# Altium PCB UWB_DWM1000_ParaChina2.PcbDoc
Units mm, origin at the board's own origin, x right, y up, seen from the top; angles counter-clockwise.
Board outline 50 x 60 mm, 4 copper layers (Component Side, Signal Layer 2, Signal Layer 1, Solder Side), stack 0.844 mm thick; 66 components, 69 nets, 281 pads, 125 vias.
Unrouted connection lines stored in the file: 85.
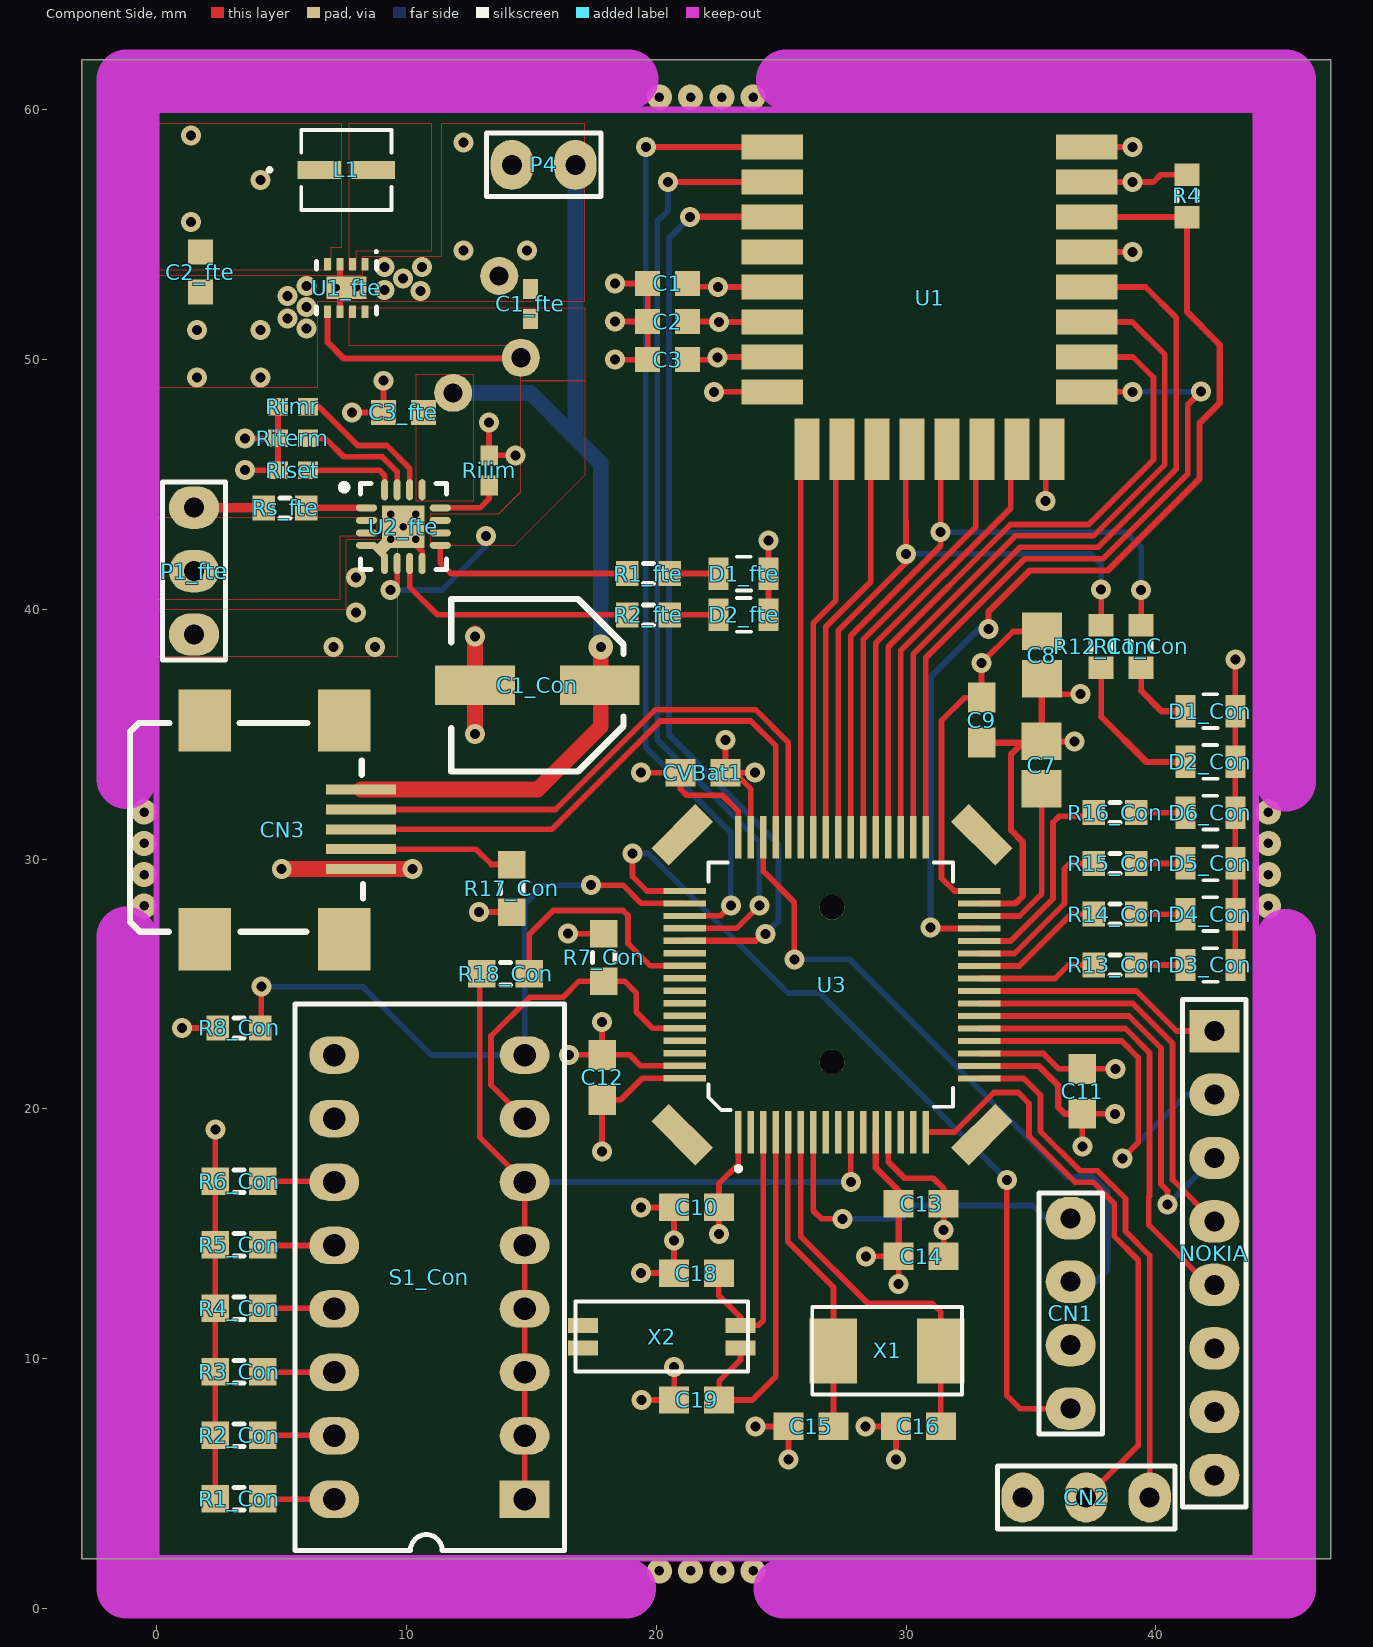
[diagram p0: Component Side view]
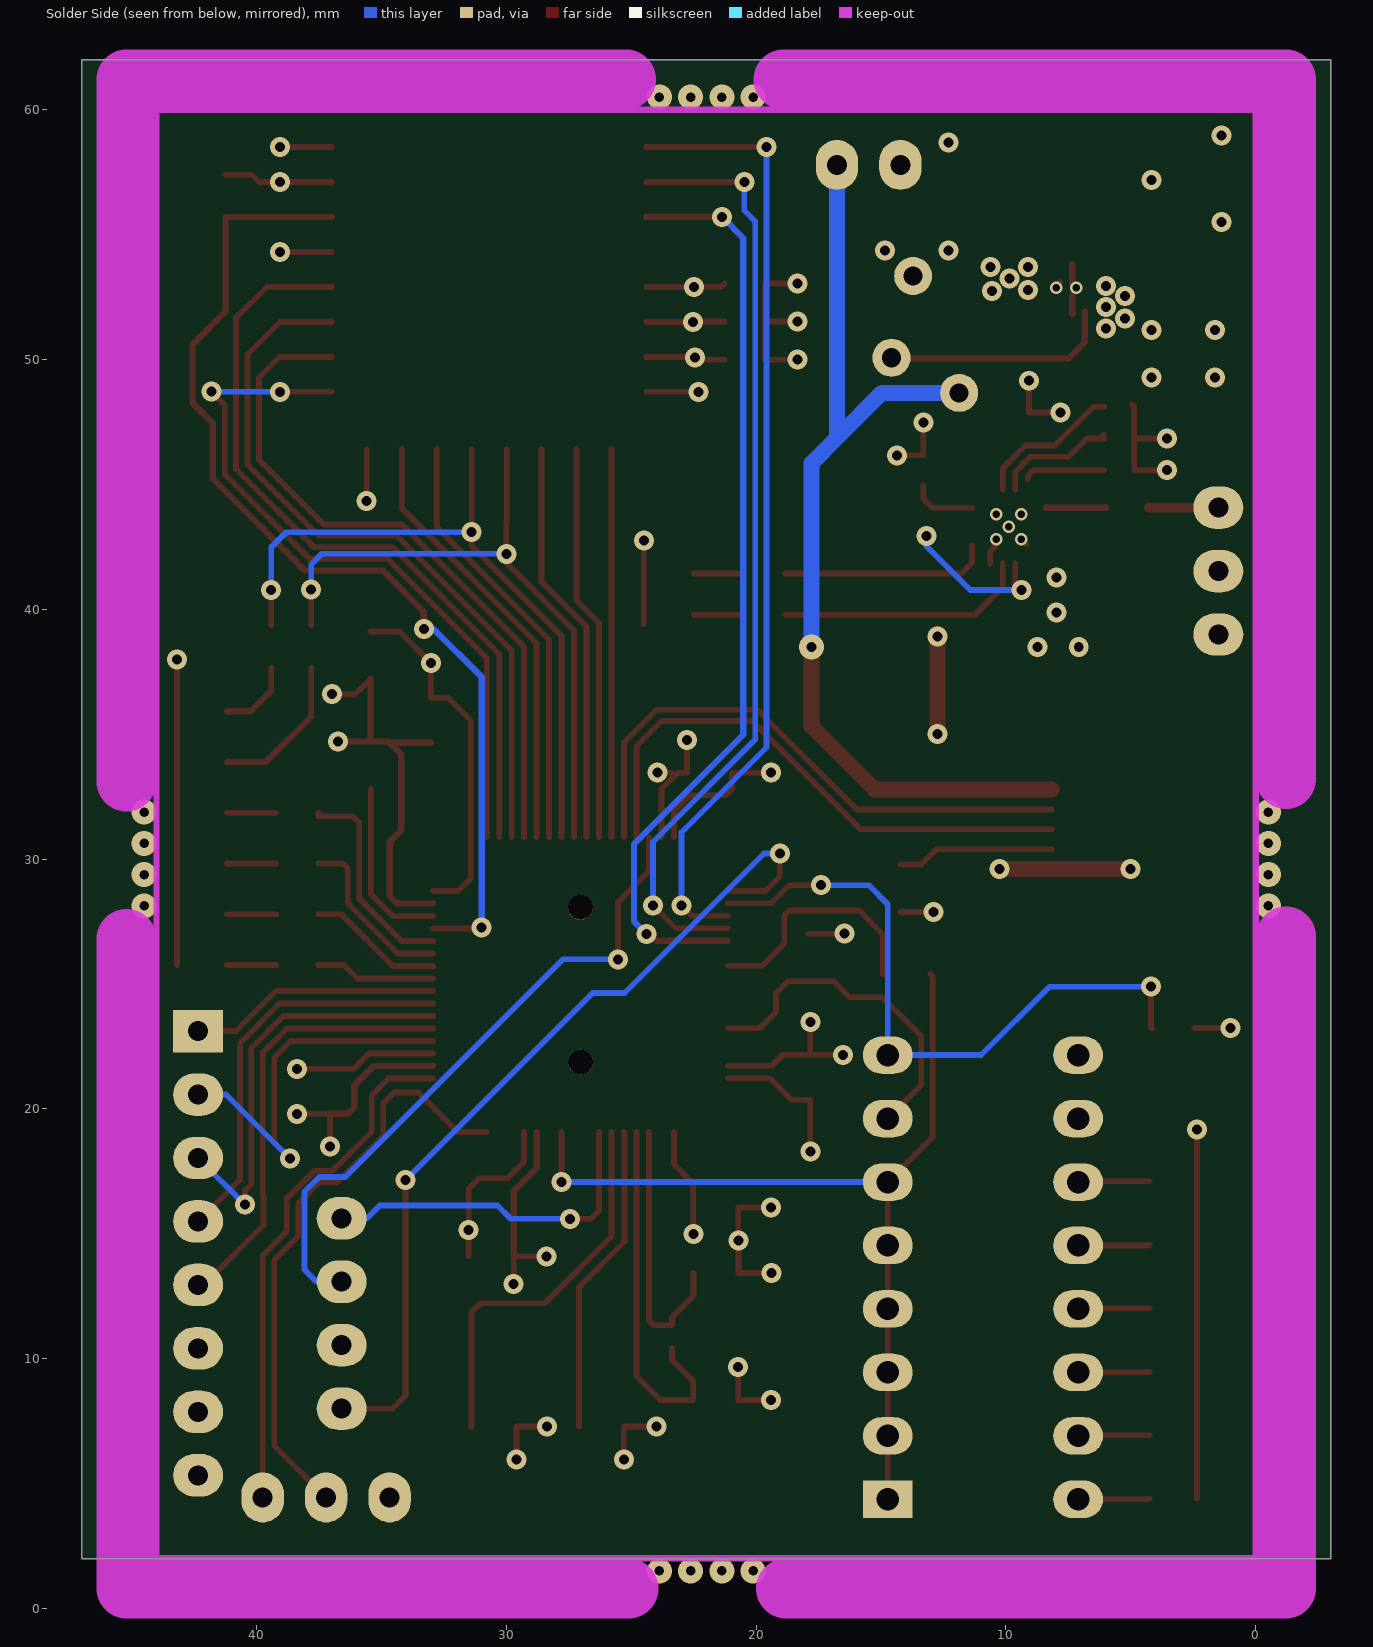
[diagram p1: Solder Side view, seen from below]
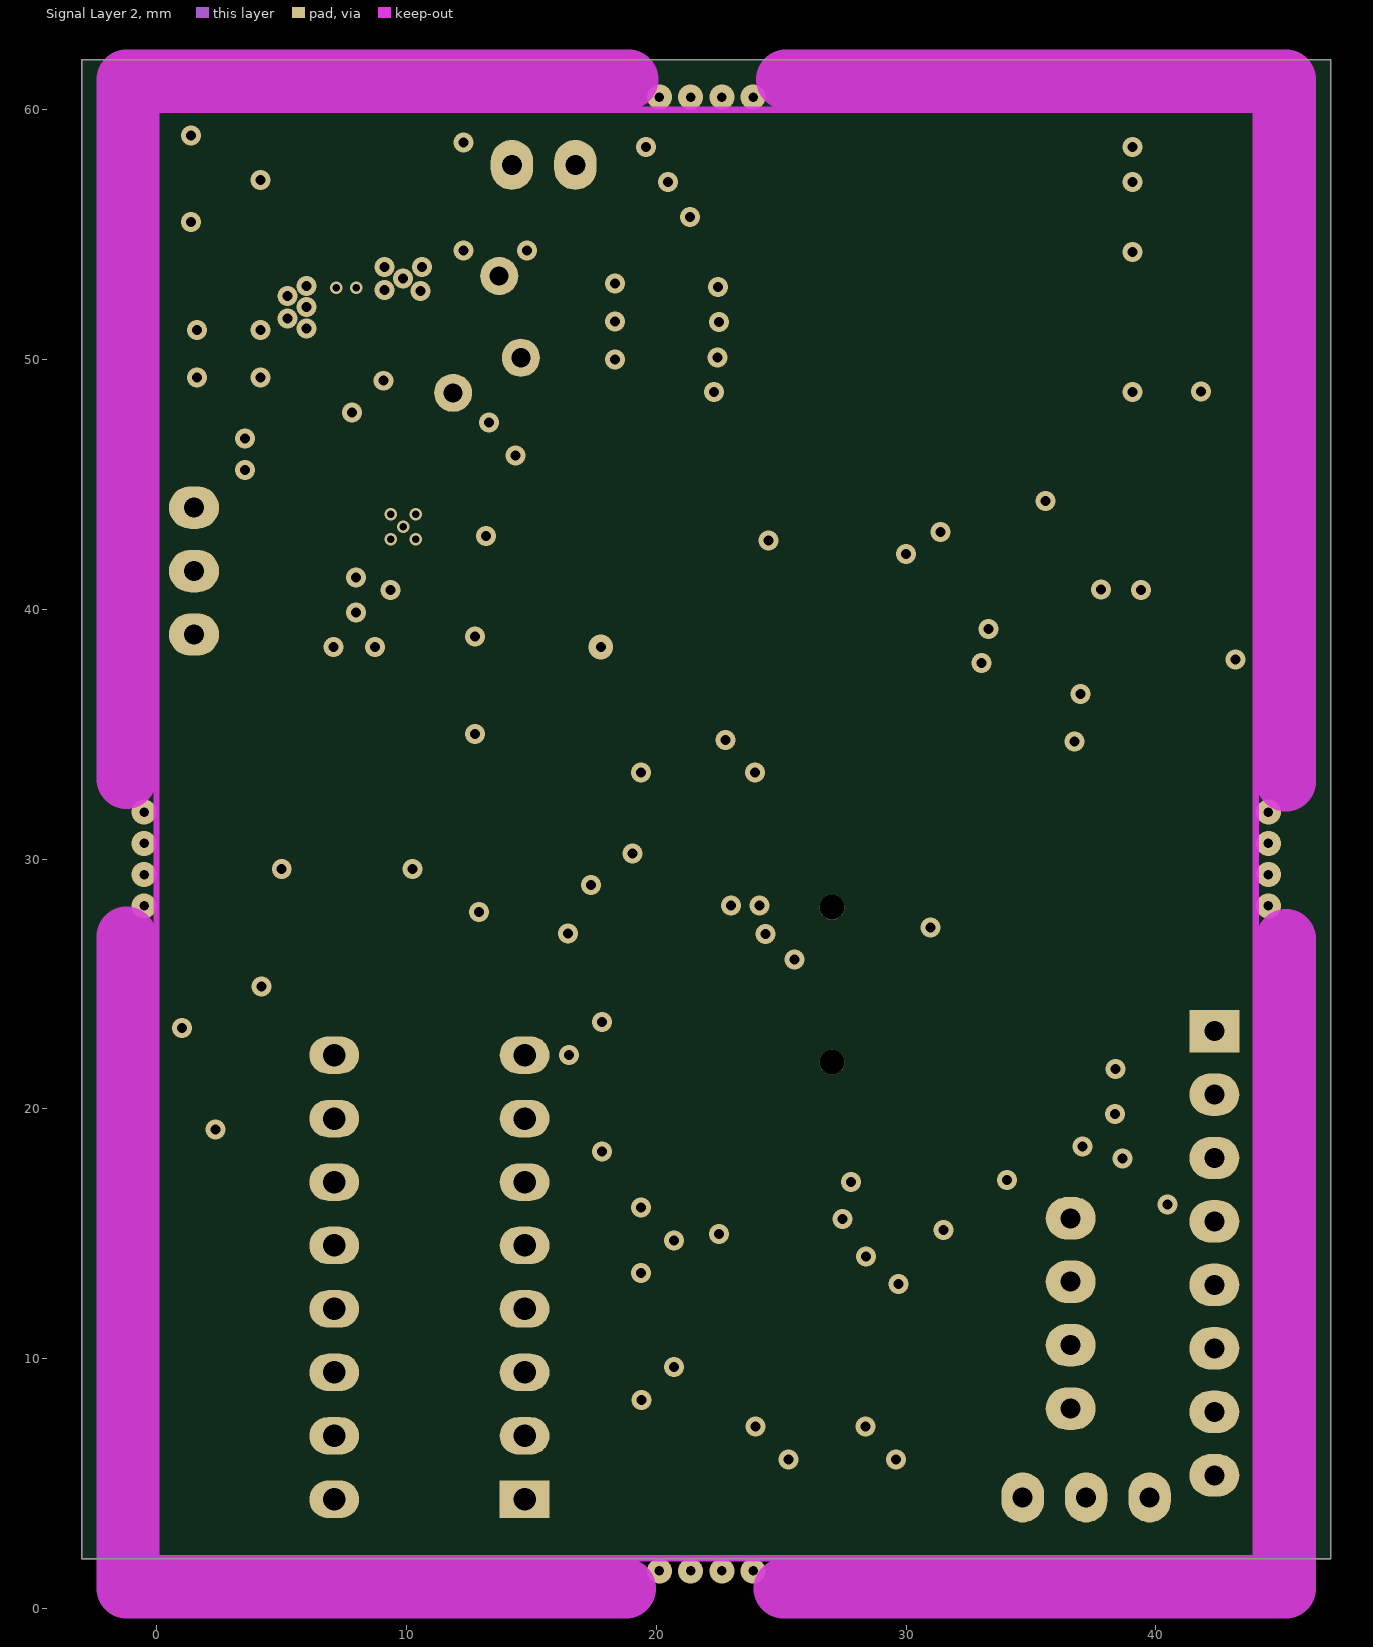
[diagram p2: Signal Layer 2]
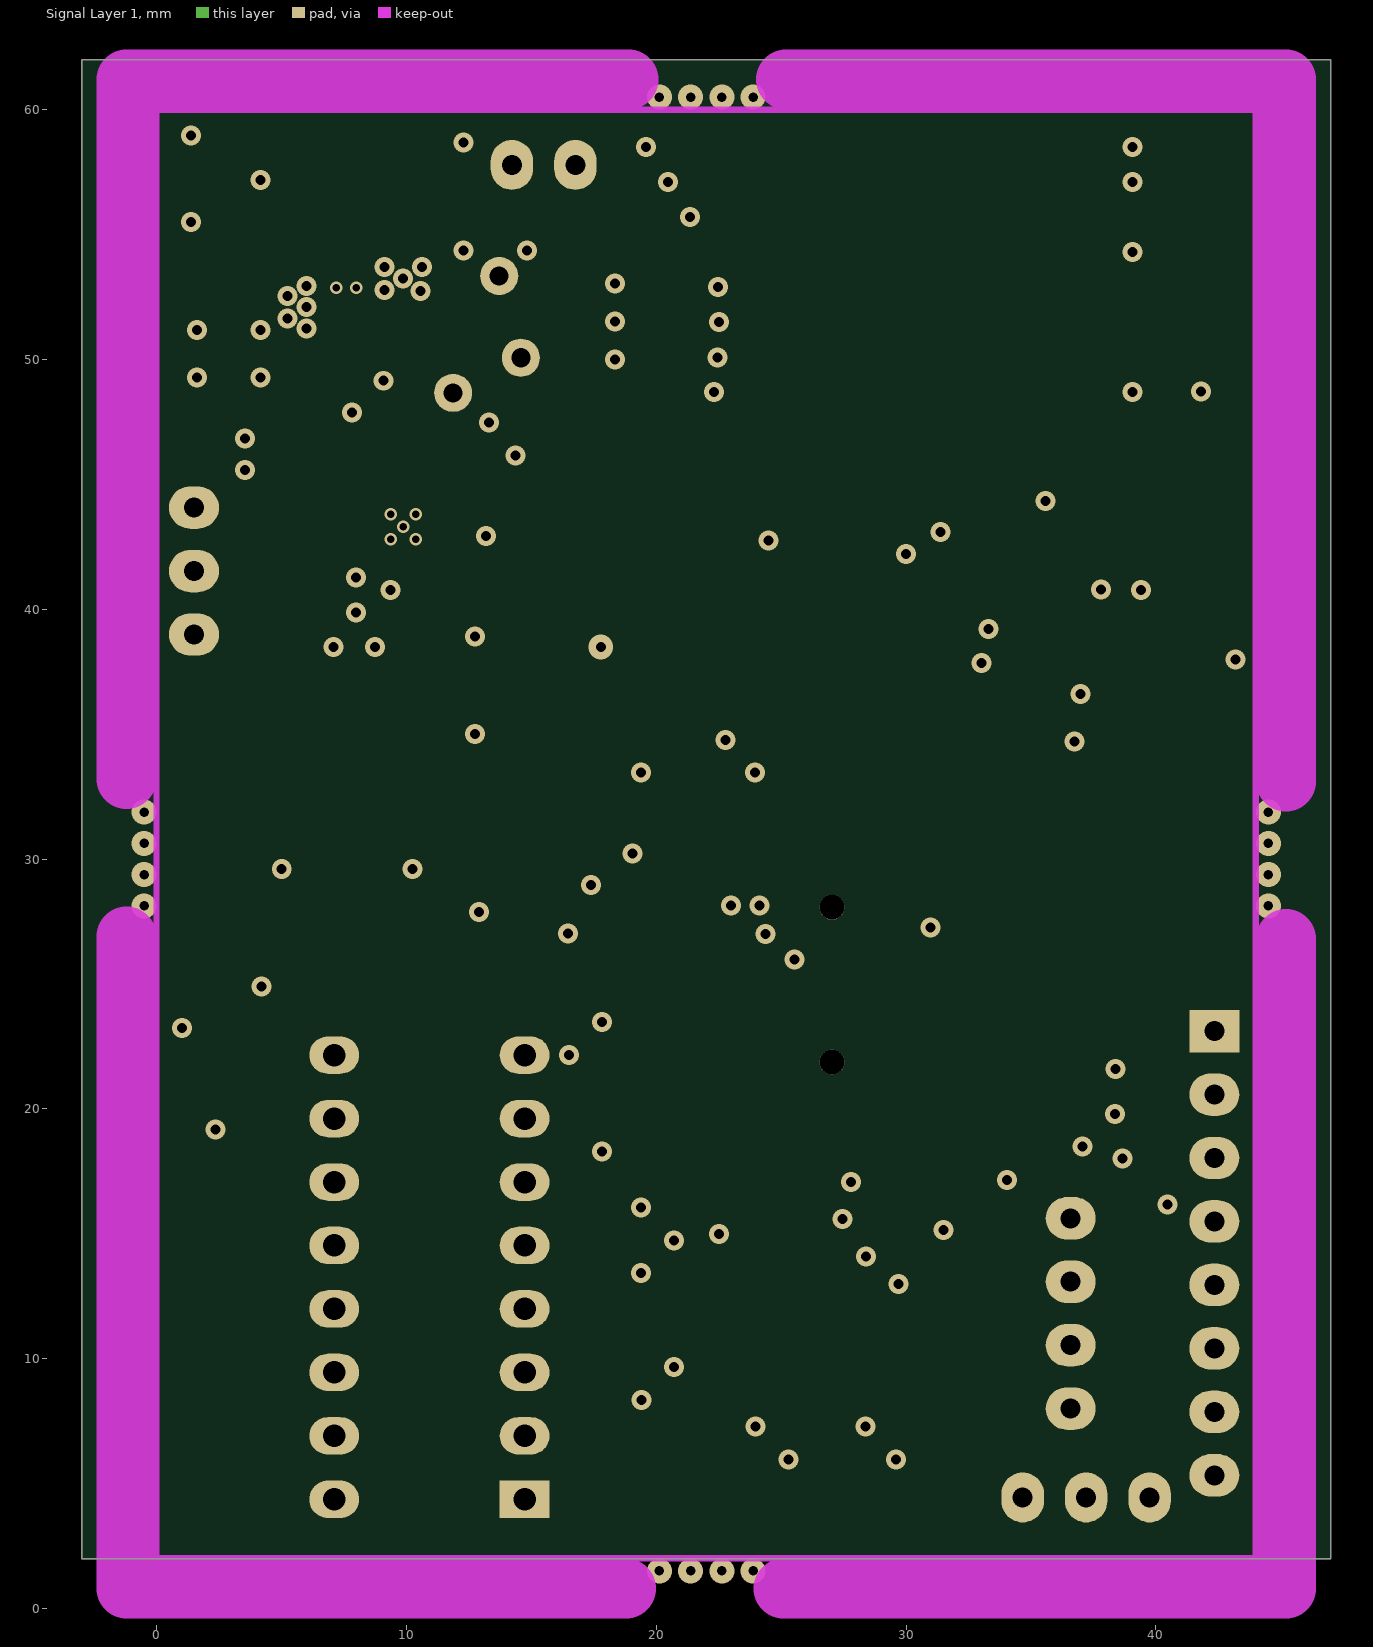
[diagram p3: Signal Layer 1]

## Layer stack, top to bottom
Top Solder: solder mask 0.0102, Solder Resist, Dk 3.5
Component Side: signal copper 0.0356
Dielectric 1: core 0.32, FR-4, Dk 4.8
Signal Layer 2: signal copper 0.036
Dielectric 3: prepreg 0.127, Dk 4.2
Signal Layer 1: signal copper 0.036
Dielectric 2: core 0.254, Dk 4.2
Solder Side: signal copper 0.0356
Bottom Solder: solder mask 0.0102, Solder Resist, Dk 3.5

## Board outline
-3,2 47,2 47,62 -3,62

## Design rules (kind name [scope] priority, off if disabled: settings)
Clearance Clearance_4 [InNamedPolygon('Top Layer-GND') vs HasFootprint('LQFP48_N') AND IsPad] p1: gap=0.381 ignorepadtopadclearanceinfootprint=FALSE except(0: Arc-Hole Track-Hole SMDPad-Hole THPad-Hole Via-Hole Fill-Hole Poly-Hole Region-Hole Text-Hole)
Clearance Clearance_3 [(InNamedPolygon('Top Layer-GND') OR InNamedPolygon('Top Layer-GND'))] p2: gap=0.381 ignorepadtopadclearanceinfootprint=FALSE except(0: Arc-Hole Track-Hole SMDPad-Hole THPad-Hole Via-Hole Fill-Hole Poly-Hole Region-Hole Text-Hole)
Clearance Clearance_2 [HasFootprint('LQFP48_N') AND IsPad vs IsTrack] p3: gap=0.152 ignorepadtopadclearanceinfootprint=FALSE except(0: Arc-Hole Track-Hole SMDPad-Hole THPad-Hole Via-Hole Fill-Hole Poly-Hole Region-Hole Text-Hole)
Clearance Clearance_1 [HasFootprint('LQFP64') AND IsPad vs HasFootprint('LQFP64') AND IsPad] p4: gap=0.152 ignorepadtopadclearanceinfootprint=FALSE except(0: Arc-Hole Track-Hole SMDPad-Hole THPad-Hole Via-Hole Fill-Hole Poly-Hole Region-Hole Text-Hole)
Clearance Clearance_5 [HasFootprint('DSG8-1600X900TP') AND IsPad vs HasFootprint('DSG8-1600X900TP') AND IsPad] p5: gap=0.152 ignorepadtopadclearanceinfootprint=FALSE except(0: Arc-Hole Track-Hole SMDPad-Hole THPad-Hole Via-Hole Fill-Hole Poly-Hole Region-Hole Text-Hole)
Clearance Clearance_6 [InComponent('U2_fte') vs InComponent('U2_fte')] p6: gap=0.12 ignorepadtopadclearanceinfootprint=FALSE except(0: Arc-Hole Track-Hole SMDPad-Hole THPad-Hole Via-Hole Fill-Hole Poly-Hole Region-Hole Text-Hole)
Clearance [All] p7: gap=0.229 ignorepadtopadclearanceinfootprint=FALSE except(0: Arc-Hole Track-Hole SMDPad-Hole THPad-Hole Via-Hole Fill-Hole Poly-Hole Region-Hole Text-Hole)
ComponentClearance ComponentClearance_1 [InComponent('NOKIA')] p1: gap=0 collisioncheckmode=3 verticalgap=0 showdistances=FALSE
ComponentClearance [All] p2: gap=0.254 collisioncheckmode=3 verticalgap=0.254 showdistances=FALSE
PolygonConnect PolygonConnect_1 [isvia] p1: connectstyle=Direct reliefconductorwidth=0.254 reliefentries=4 polygonreliefangle="90 Angle" airgapwidth=0.254
PolygonConnect [All] p2: connectstyle=Direct reliefconductorwidth=0.254 reliefentries=4 polygonreliefangle="90 Angle" airgapwidth=0.254
RoutingVias [All] p1: holewidth=0.4 width=0.8 viastyle="Through Hole" minholewidth=0.4 minwidth=0.8 maxholewidth=0.4 maxwidth=0.8
SolderMaskExpansion [All] p1: expansion=0.102
Width [All] p1: maxlimit=0.762 minlimit=0.229 preferedwidth=0.229 minimp=50.000000 maximp=50.000000 favimp=50.000000
29 further rules are at their usual default settings.

## Classes and differential pairs
component class UWB_DWM1000: C1 C2 C3 R4 U1
component class UWB_STM32F411: C7 C8 C9 C10 C11 C12 C13 C14 C15 C16 C18 C19 C? CN? CVBat1 R12 R? SW? U3 U? X1 X2 X?
component class UWB_Conectores: C1_Con CN1 CN2 CN3 D1_Con D2_Con D3_Con D4_Con D5_Con D6_Con NOKIA P4 R1_Con R2_Con R3_Con R4_Con R5_Con R6_Con R7_Con R8_Con R11_Con R12_Con R13_Con R14_Con R15_Con R16_Con R17_Con R18_Con S1_Con
component class UWB_Fuente-Cargador: C1_fte C2_fte C3_fte D1_fte D2_fte L1 P1_fte R1_fte R2_fte Rilim Riset Riterm Rs_fte Rtmr U1_fte U2_fte

## Components (designator, comment, footprint, x,y, rotation, side; value= is the part's Value field where it differs from the comment)
C1 "Cap" CAPC1608N 20.456,53.039 r180 top
C1_Con "Cap Pol1" "PANASONIC SIZE D (DIA. 6.3)" 15.24,36.957 r90 top
C1_fte "Cap" CAPC1005N 14.961,52.225 r90 top
C2 "Cap" CAPC1608N 20.456,51.515 r180 top
C2_fte "Cap" CAPC1608N 1.753,53.495 r270 top
C3 "Cap" CAPC1608N 20.456,49.991 r180 top
C3_fte "Cap" CAPC1608N 9.881,47.879 r180 top
C7 "Cap" CAPC2012M 35.427,33.757 r270 top
C8 "Cap" CAPC2012M 35.437,38.161 r90 top
C9 "Cap" CAPC1608M 33.024,35.56 r90 top
C10 "Cap" CAPC1608M 21.615,16.057 r0 top
C11 "Cap" CAPC1608M 37.059,20.705 r90 top
C12 "Cap" CAPC1608M 17.831,21.264 r270 top
C13 "Cap" CAPC1608M 30.607,16.209 r0 top
C14 "Cap" CAPC1608M 30.607,14.101 r0 top
C15 "Cap" CAPC1608M 26.195,7.288 r180 top
C16 "Cap" CAPC1608M 30.495,7.288 r180 top
C18 "Cap" CAPC1608M 21.608,13.427 r180 top
C19 "Cap" CAPC1608M 21.619,8.347 r180 top
CN1 "SWD" "HDR1X4 - SMALL" 36.592,8.001 r90 top
CN2 "UART2" HDR1X3 39.751,4.445 r180 top
CN3 "USB" USB_Montaje 4.786,31.322 r270 top
CVBat1 "Cap" CAPC1608M 21.869,33.456 r180 top
D1_Con "LED" "LED SMD 0805" 42.18,35.919 r0 top
D1_fte "LED" "LED SMD 0805" 23.495,41.427 r0 top
D2_Con "LED" "LED SMD 0805" 42.18,33.887 r0 top
D2_fte "LED" "LED SMD 0805" 23.495,39.776 r0 top
D3_Con "LED" "LED SMD 0805" 42.18,25.759 r0 top
D4_Con "LED" "LED SMD 0805" 42.18,27.791 r0 top
D5_Con "LED" "LED SMD 0805" 42.18,29.823 r0 top
D6_Con "LED" "LED SMD 0805" 42.18,31.855 r0 top
L1 "Inductor" IHLP-1212AE 7.595,57.584 r0 top
NOKIA "Header 8" HDR1X8 42.339,14.224 r270 top
P1_fte "Batt" HDR1X3 1.499,44.069 r270 top
P4 "Header 2" HDR1X2 14.224,57.785 r0 top
R1_Con "10K" RESC1608M 3.302,4.398 r180 top
R1_fte "Res1" RESC1608N 19.685,41.427 r0 top
R2_Con "10K" RESC1608M 3.302,6.938 r0 top
R2_fte "Res1" RESC1608N 19.685,39.776 r0 top
R3_Con "10K" RESC1608M 3.302,9.478 r0 top
R4 "Res1" RESC1608N 41.25,56.544 r270 top
R4_Con "10K" RESC1608M 3.302,12.018 r0 top
R5_Con "10K" RESC1608M 3.302,14.558 r0 top
R6_Con "10K" RESC1608M 3.302,17.098 r0 top
R7_Con "10K" RESC1608M 17.907,26.064 r270 top
R8_Con "10K" RESC1608N 3.302,23.241 r0 top
R11_Con "Res1" RESC1608N 39.411,38.51 r90 top
R12_Con "Res1" RESC1608N 37.811,38.51 r90 top
R13_Con "Res1" RESC1608N 38.37,25.759 r180 top
R14_Con "Res1" RESC1608N 38.37,27.791 r180 top
R15_Con "Res1" RESC1608N 38.37,29.823 r180 top
R16_Con "Res1" RESC1608N 38.37,31.855 r180 top
R17_Con "10K" RESC1608M 14.224,28.829 r270 top
R18_Con "10K" RESC1608M 13.97,25.4 r180 top
Rilim "Res1" RESC1005N 13.31,45.558 r270 top
Riset "Res1" RESC1005N 5.461,45.568 r0 top
Riterm "Res1" RESC1005N 5.461,46.838 r0 top
Rs_fte "Res1" RESC1608N 5.143,44.057 r0 top
Rtmr "Res1" RESC1005N 5.461,48.108 r0 top
S1_Con "SW-DIP8" DIP-16-KEY 10.922,13.263 r90 top
U1 "DWM1000" DWM1000 24.442,46.2 r0 top
U1_fte "TPS62063DSGR" DSG8-1600X900TP 7.595,52.86 r270 top
U2_fte "BQ24232RGTR" RGT16-1700X1700TP 9.881,43.307 r0 top
U3 "MCU_LQFP64" LQFP64 27.035,24.972 r0 top
X1 "8MHz(16pF)" "XTAL ABM7" 29.245,10.316 r180 top
X2 "8MHz(16pF)" "XTAL ABS13" 20.222,10.887 r180 top

## Footprints (in the part's own frame and the unit in brackets; to place one, negate y for a bottom-side part, rotate by r counter-clockwise, add the part's x,y. Pads: shape width x height; smd on the part's side, far side on the other; paste and mask are expansions set on the pad)
CAPC1005N [mm] "Chip Capacitor, Body 1.0x0.5mm, IPC Medium Density"
  rect 0.8x0.6 smd: 1(-0.6,0) 2(0.6,0)
  body extent -0.55,-0.3 0.55,0.3, height 0.6
CAPC1608M [mm] "Chip Capacitor, Body 1.6x0.8mm, IPC Low Density"
  rect 1.2x1.1 smd: 1(-0.9,0) 2(0.9,0)
  body extent -0.87,-0.48 0.87,0.48, height 0.85
CAPC1608N [mm] "Chip Capacitor, Body 1.6x0.8mm, IPC Medium Density"
  rect 1x1 smd: 1(-0.8,0) 2(0.8,0)
  body extent -0.87,-0.48 0.87,0.48, height 0.85
CAPC2012M [mm] "Chip Capacitor, Body 2.0x1.3mm, IPC Low Density"
  rect 1.5x1.6 smd: 1(-0.95,0) 2(0.95,0)
  body extent -1.1,-0.72 1.1,0.72, height 1.1
DIP-16-KEY [mm] "DIP; 16 Leads; Row Spacing 7.62 mm; Pitch 2.54 mm"
  rect 1.5x2 hole 0.9: 1(-8.89,-3.81)
  oval 1.5x2 hole 0.9: 2(-6.35,-3.81) 3(-3.81,-3.81) 4(-1.27,-3.81) 5(1.27,-3.81) 6(3.81,-3.81) 7(6.35,-3.81) 8(8.89,-3.81) 9(8.89,3.81) 10(6.35,3.81) 11(3.81,3.81) 12(1.27,3.81) 13(-1.27,3.81) 14(-3.81,3.81) 15(-6.35,3.81) 16(-8.89,3.81)
  silkscreen extent -10.94,-5.4 10.94,5.39, body extent -10.85,-5.1 11.05,5.06, height 6.9
DSG8-1600X900TP [mm] "SON, 8-Leads, Body 2x2mm, Pitch 0.5mm, Thermal Pad 1.6x0.9mm, TI Recommended"
  rect 0.5x0.28 smd paste-0.14 mask+0.07: 1(-0.95,0.75) 2(-0.95,0.25) 3(-0.95,-0.25) 4(-0.95,-0.75) 5(0.95,-0.75) 6(0.95,-0.25) 7(0.95,0.25) 8(0.95,0.75)
  rect 0.9x1.6 smd paste-0.45 mask+0.07: 9(0,0)
  silkscreen extent -1.5,-1.2 1.05,1.25, body extent -1.05,-1.05 1.05,1.05, height 0.8
DWM1000 [mm]
  rect 2.45x1 smd: 1(0.205,12.3) 2(0.205,10.9) 3(0.205,9.5) 4(0.205,8.1) 5(0.205,6.7) 6(0.205,5.3) 7(0.205,3.9) 8(0.205,2.5) 17(12.795,2.5) 18(12.795,3.9) 19(12.795,5.3) 20(12.795,6.7) 21(12.795,8.1) 22(12.795,9.5) 23(12.795,10.9) 24(12.795,12.3)
  rect 1x2.45 smd: 9(1.6,0.205) 10(3,0.205) 11(4.4,0.205) 12(5.8,0.205) 13(7.2,0.205) 14(8.6,0.205) 15(10,0.205) 16(11.4,0.205)
  body extent 0,-0.01 13,22.99, height 2.9
HDR1X2 [mm] "Connector; Header; 2 Position"
  oval 1.7x2 hole 0.8: 1(0,0) 2(2.54,0)
  silkscreen extent -1.02,-1.27 3.56,1.27
HDR1X3 [mm] "Connector; Header; 2 Position"
  oval 1.7x2 hole 0.8: 1(0,0) 2(2.54,0) 3(5.08,0)
  silkscreen extent -1.02,-1.27 6.1,1.27, body extent -1.26,-1.45 6.36,1.47, height 8.51
"HDR1X4 - SMALL" [mm]
  oval 1.7x2 hole 0.8: 1(0,0) 2(2.54,0) 3(5.08,0) 4(7.62,0)
  silkscreen extent -1.02,-1.27 8.64,1.27, body extent -1.27,-1.46 8.89,1.46, height 8.51
HDR1X8 [mm] "Connector; Header; 8 Position"
  rect 1.7x2 hole 0.8: 1(-8.89,0)
  oval 1.7x2 hole 0.8: 2(-6.35,0) 3(-3.81,0) 4(-1.27,0) 5(1.27,0) 6(3.81,0) 7(6.35,0) 8(8.89,0)
  silkscreen extent -10.16,-1.27 10.16,1.27, body extent -10.16,-1.25 10.16,1.25, height 8.6
IHLP-1212AE [mil]
  rect 69x28 smd: 1(-42.5,0) 2(42.5,0)
  silkscreen extent -124,-63 71,63, body extent -72,-59 72,59, height 79
"LED SMD 0805" [mm]
  rect 0.8x1.3 smd: A(-1,0) K(1,0)
  silkscreen extent -0.28,-0.67 0.3,0.67, body extent -1.01,-0.62 1.01,0.63, height 1.1
LQFP64 [mm]
  rect 1x2.5 smd rot 45: 0(-6,-6) 0(6,6)
  rect 1x2.5 smd rot 135: 0(-6,6) 0(6,-6)
  round 1 hole 1 unplated: 0(0,-3.1) 0(0,3.1)
  rect 0.25x1.7 smd: 1(-3.747,-5.901) 2(-3.247,-5.901) 3(-2.747,-5.901) 4(-2.247,-5.901) 5(-1.747,-5.901) 6(-1.247,-5.901) 7(-0.747,-5.901) 8(-0.247,-5.901) 9(0.253,-5.901) 10(0.753,-5.901) 11(1.253,-5.901) 12(1.753,-5.901) 13(2.253,-5.901) 14(2.753,-5.901) 15(3.253,-5.901) 16(3.753,-5.901) 33(3.753,5.902) 34(3.253,5.902) 35(2.753,5.902) 36(2.253,5.902) 37(1.753,5.902) 38(1.253,5.902) 39(0.753,5.902) 40(0.253,5.902) 41(-0.247,5.902) 42(-0.747,5.902) 43(-1.247,5.902) 44(-1.747,5.902) 45(-2.247,5.902) 46(-2.747,5.902) 47(-3.247,5.902) 48(-3.746,5.901)
  rect 1.7x0.25 smd: 17(5.901,-3.753) 18(5.901,-3.253) 19(5.901,-2.753) 20(5.901,-2.253) 21(5.901,-1.753) 22(5.901,-1.253) 23(5.901,-0.753) 24(5.901,-0.253) 25(5.901,0.247) 26(5.901,0.747) 27(5.901,1.247) 28(5.901,1.747) 29(5.901,2.247) 30(5.901,2.747) 31(5.901,3.247) 32(5.901,3.747) 49(-5.902,3.753) 50(-5.902,3.253) 51(-5.902,2.753) 52(-5.902,2.253) 53(-5.902,1.753) 54(-5.902,1.253) 55(-5.902,0.753) 56(-5.902,0.253) 57(-5.902,-0.247) 58(-5.902,-0.747) 59(-5.902,-1.247) 60(-5.902,-1.747) 61(-5.902,-2.247) 62(-5.902,-2.746) 63(-5.902,-3.246) 64(-5.902,-3.746)
  silkscreen extent -4.94,-7.42 4.84,4.89, body extent -5,-6 5,6, height 1.5
"PANASONIC SIZE D (DIA. 6.3)" [mm]
  rect 1.6x3.2 smd: 1(0,-2.5) 2(0,2.5)
  silkscreen extent -3.45,-3.45 3.45,3.45, body extent -3.3,-3.5 3.3,3.5, height 5.4
RESC1005N [mm] "Chip Resistor, Body 1.1x0.5mm, IPC Medium Density"
  rect 0.8x0.7 smd: 1(-0.6,0) 2(0.6,0)
  body extent -0.55,-0.3 0.55,0.3, height 0.4
RESC1608M [mm] "Chip Resistor, Body 1.6x0.8mm, IPC Low Density"
  rect 1.1x1.1 smd: 1(-0.95,0) 2(0.95,0)
  silkscreen extent -0.2,-0.45 0.2,0.45, body extent -0.85,-0.48 0.85,0.48, height 0.6
RESC1608N [mm] "Chip Resistor, Body 1.6x0.8mm, IPC Medium Density"
  rect 0.9x1 smd: 1(-0.85,0) 2(0.85,0)
  silkscreen extent -0.2,-0.4 0.2,0.4, body extent -0.85,-0.48 0.85,0.48, height 0.6
RGT16-1700X1700TP [mm] "QFN, 16-Leads, Body 3x3mm, Pitch 0.5mm, Thermal Pad 1.7x1.7mm, TI Recommended"
  oval 0.85x0.28 smd paste-0.025 mask+0.07: 1(-1.475,0.75) 2(-1.475,0.25) 3(-1.475,-0.25) 4(-1.475,-0.75) 9(1.475,-0.75) 10(1.475,-0.25) 11(1.475,0.25) 12(1.475,0.75)
  oval 0.28x0.85 smd paste-0.025 mask+0.07: 5(-0.75,-1.475) 6(-0.25,-1.475) 7(0.25,-1.475) 8(0.75,-1.475) 13(0.75,1.475) 14(0.25,1.475) 15(-0.25,1.475) 16(-0.75,1.475)
  rect 1.7x1.7 smd paste-0.85 mask+0.07: 17(0,0)
  silkscreen extent -2.5,-1.73 1.73,1.73, body extent -1.57,-1.57 1.58,1.58, height 1
USB_Montaje [mm] "Conector USB de montaje superficial"
  rect 0.4x2.8 smd: 1(-1.46,3.39) 2(-0.664,3.39) 3(0.132,3.39) 4(0.929,3.39) 5(1.725,3.39)
  rect 2.5x2.1 smd: SHI(-4.225,2.725) SHI(-4.225,-2.85) SHI(4.525,2.725) SHI(4.525,-2.85)
  silkscreen extent -4.13,-5.85 4.22,3.48, body extent -5.2,-5.65 5.5,3.55, height 3.95
"XTAL ABM7" [mm] "Cristal de cuarzo de montaje superficial"
  rect 1.9x2.6 smd: 1(-2.15,0) 2(2.15,0)
  silkscreen extent -3,-1.75 3,1.75, body extent -3.1,-1.85 3.1,1.85, height 1.44
"XTAL ABS13" [mm] "Cristal de cuarzo de montaje superficial"
  rect 1.2x0.6 smd: 1(-3.15,-0.45) 2(-3.15,0.45) 3(3.15,0.45) 4(3.15,-0.45)
  silkscreen extent -3.45,-1.4 3.45,1.4, body extent -3.45,-0.75 3.45,0.75, height 1.4

## Part data
C1 C1_fte C2 C2_fte C3 C3_fte C7 C8 C9 C10 C11 C12 C13 C14 C15 C16 C18 C19 CVBat1: "Capacitor"
C1_Con: "Polarized Capacitor (Radial)"
CN1: library part "Header 4", "Header, 4-Pin"
CN2: library part "Header 3", "Header, 3-Pin"
CN3: library part "USB-MINI-typeB connector", "USB-MINI-typeB connector"
D1_Con D1_fte D2_Con D2_fte D3_Con D4_Con D5_Con D6_Con: "Typical INFRARED GaAs LED"
P1_fte: library part "Header 3", "Header, 3-Pin MCU"
P4: "Header, 2-Pin"
R1_Con R2_Con R3_Con R4_Con R5_Con R6_Con R7_Con R8_Con R17_Con R18_Con: library part res1, "Resistor"
R1_fte R2_fte R4 R11_Con R12_Con R13_Con R14_Con R15_Con R16_Con Rilim Riset Riterm Rs_fte Rtmr: "Resistor"
S1_Con: "4009 Series DIP Switch, Raised actuator"
U1: "MOD IEEE802.15.4-2011 UWB TXRX"
U1_fte: "Buck Step Down Regulator with 2.7 to 6 V Input and 3.3 V Output, -40 to 85 degC, 8-Pin WSON (DSG), Green (RoHS & no Sb/Br)"
U2_fte: "USB Friendly 0.5 A Li+ Charger with Dynamic Power Management, 10.5 V OVP, 4.3 V, -40 to 85 degC, 16-pin QFN (RGT), Green (RoHS & no Sb/Br)"
X1 X2: library part CRYSTAL, "Crystal"

## Free pads (board coordinates)
  round 1.524 hole 0.762: 2(11.872,48.661) 2(13.716,53.34) 2(14.58,50.066)
  rect 1x0.5 smd rot 45: 3(9.174,42.6)

## Via types
v1: diameter 0.8, hole 0.4, Component Side to Solder Side, tented both sides, 98 vias
v2: diameter 1, hole 0.38, Component Side to Solder Side, 16 vias
v3: diameter 0.5, hole 0.3, Component Side to Solder Side, 7 vias
v4: diameter 0.8, hole 0.4, Component Side to Solder Side, 3 vias
v5: diameter 1, hole 0.4, Component Side to Solder Side, tented both sides, 1 vias

## Nets (pads, with @x,y where several pads share a name; then routed paths per layer and width w, separated by ;. In a path a pad name is that pad's centre, name@x,y a point inside that pad or via, vN(x,y) a via of type N, cw(c..) or ccw(c..) an arc to the next point about the centre after c; other vN are vias at no path point)
+3.3V: C1.1 C2.1 C2_fte.1 C3.1 C8.2 C9.2 C10.2 C11.2 C12.2 C13.2 C14.2 CVBat1.2 D1_fte.K D2_fte.K L1.1 NOKIA.6 R7_Con.1 R8_Con.1 U1.5 U1.6 U1.7 U1_fte.4 U3.1 U3.13 U3.19 U3.32 U3.48 U3.64 | length 58.4
  Component Side w0.229: v1(1.01,23.241) R8_Con.1 ; v1(16.465,27.014) R7_Con.1 ; v1(17.831,18.286) C12.2 18.582,20.364 19.444,21.225 U3.64 ; v1(19.4,33.456) CVBat1.2 20.969,32.806 21.223,32.552 22.646,32.552 23.288,31.909 U3.48 ; C3.1 22.377,49.991 v1(22.454,50.067) 22.486,50.1 U1.7@24.393,50.1 ; C2.1 22.504,51.515 v1(22.519,51.5) U1.6@24.393,51.5 ; C1.1 21.383,52.912 22.467,52.912 v1(22.479,52.9) U1.5@24.393,52.9 ; v1(22.515,14.99) C10.2 22.515,17.007 23.288,17.78 U3.1 ; D2_fte.K@24.495,39.395 D2_fte.K D1_fte.K v1(24.495,42.743) ; U3.13 29.288,17.883 29.947,17.225 31.09,17.225 31.507,16.808 C13.2 v1(31.507,15.142) C14.2 ; U3.19 35.494,22.219 36.108,21.605 C11.2 v1@38.368,21.605 ; U3.32 31.937,28.718 31.42,29.235 31.42,35.544 32.336,36.46 C9.2 v1(33.024,37.855) 34.279,39.111 C8.2
  other v1: 38.379,21.594 1.372,55.499 4.166,57.178 1.372,58.956
+VBAT: P1_fte.2 U2_fte.2 U2_fte.3
+VIN: C1_fte.1 pad.2@14.58,50.066 U1_fte.5 U1_fte.7 U1_fte.8 U2_fte.6 U2_fte.10 U2_fte.11 | length 15.3
  Component Side w0.229: v1(9.373,40.767) 9.631,41.025 U2_fte.6
  Component Side w0.254: U1_fte.5 6.845,50.686 7.493,50.038 pad.2@14.58,50.038
  Solder Side w0.229: v1(9.373,40.767) 11.43,40.767 13.183,42.52 v1(13.183,42.926)
ADDR: R18_Con.2 S1_Con.1 S1_Con.2 S1_Con.3 S1_Con.4 S1_Con.5 S1_Con.6 U3.10 | length 36.9
  Component Side w0.229: R18_Con.2 12.932,25.312 12.932,18.873 S1_Con.6 S1_Con.5 S1_Con.4 S1_Con.3 S1_Con.2 S1_Con.1 ; U3.10 27.788,17.25 v1@27.813,17.225
  Solder Side w0.229: S1_Con.3 S1_Con.3@14.884,9.605 ; S1_Con.6 v1(27.788,17.073)
BOOT0: R7_Con.2 S1_Con.7 U3.60 | length 13.7
  Component Side w0.229: S1_Con.7 13.389,20.955 13.389,22.914 14.939,24.464 16.256,24.464 16.906,25.114 R7_Con.2 18.73,25.114 19.202,24.642 19.202,23.88 19.857,23.225 U3.60
DW_CLK: U1.20 U3.34 | length 31.3
  Component Side w0.229: U3.34 30.288,38.206 34.561,42.479 37.689,42.479 40.818,45.607 40.818,51.667 39.585,52.9 U1.20 U1.20@36.983,52.9
DW_CS: U1.17 U3.33 | length 29.3
  Component Side w0.229: U3.33 30.788,38.06 34.751,42.022 37.879,42.022 41.275,45.418 41.275,48.188 v1(41.808,48.721) ; U1.17@36.983,48.7 U1.17 v1(39.061,48.7)
  Solder Side w0.229: v1(39.061,48.7) 41.787,48.7 v1(41.808,48.721) v1@42.037,48.721
DW_EXTON: U1.1 U3.51 | length 38.6
  Component Side w0.229: v1(19.583,58.5) U1.1@24.393,58.5 ; U3.51 22.565,27.725 v1(22.987,28.147)
  Solder Side w0.229: v1(19.583,58.5) 19.583,34.472 22.987,31.068 v1(22.987,28.147)
DW_IO0: U1.15 U3.37 | length 17.8
  Component Side w0.229: U3.37 28.788,38.646 34.188,44.046 U1.15@34.188,46.405
DW_IO1: U1.14 U3.38 | length 17.4
  Component Side w0.229: U3.38 28.288,38.793 32.788,43.292 U1.14@32.788,46.405
DW_IO2: R11_Con.2 U1.13 U3.39 | length 28.4
  Component Side w0.229: U3.39 27.788,38.939 31.388,42.539 v1(31.388,43.082) U1.13@31.388,46.405 ; R11_Con.2 v1(39.411,40.767)
  Solder Side w0.229: v1(31.388,43.082) 38.809,43.082 39.411,42.48 v1(39.411,40.767)
DW_IO3: R12_Con.2 U1.12 U3.40 | length 27.1
  Component Side w0.229: U3.40 27.288,39.153 29.997,41.861 v1(29.997,42.219) 29.997,43.514 29.988,43.523 U1.12@29.988,46.405 ; R12_Con.2 v1(37.811,40.796)
  Solder Side w0.229: v1(29.997,42.219) 37.389,42.219 37.811,41.796 v1(37.811,40.796)
DW_IO4: U1.11 U3.41 | length 16.3
  Component Side w0.229: U3.41 26.788,39.299 28.588,41.099 U1.11@28.588,46.405
DW_IO5: U1.10 U3.42 | length 15.9
  Component Side w0.229: U3.42 26.288,39.446 27.188,40.346 U1.10@27.188,46.405
DW_IO6: U1.9 U3.43 | length 15.5
  Component Side w0.229: U3.43 U1.9@25.788,46.405
DW_IRQ: R4.2 U1.22 U3.29 | length 42.1
  Component Side w0.254: v4(30.988,27.258) 31.027,27.219 U3.29 ; v1(33.299,39.218) 33.299,39.906 34.945,41.552 38.073,41.552 41.745,45.223 41.745,47.438 42.564,48.257 42.564,50.586 41.244,51.906 41.244,55.7 U1.22 U1.22@36.983,55.7
  Solder Side w0.254: v4(30.988,27.258) 30.988,37.287 32.918,39.218 v1(33.299,39.218)
DW_MISO: U1.19 U3.35 | length 29.5
  Component Side w0.229: U3.35 29.788,38.353 34.372,42.936 37.5,42.936 40.361,45.797 40.361,50.194 39.055,51.5 U1.19 U1.19@36.983,51.5
DW_MOSI: U1.18 U3.36 | length 27.9
  Component Side w0.229: U3.36 29.288,38.499 34.182,43.393 37.311,43.393 39.903,45.986 39.903,49.276 39.08,50.1 U1.18 U1.18@36.983,50.1
DW_RST: U1.3 U3.53 | length 37.5
  Component Side w0.254: U3.53 23.978,26.725 24.257,27.004 v1(24.384,27.004) ; v1(21.361,55.706) 24.387,55.706 U1.3@24.393,55.7
  Solder Side w0.254: v1(21.361,55.706) 20.511,54.855 20.511,34.971 24.892,30.59 24.892,27.512 v1(24.384,27.004)
DW_WAKEUP: U1.2 U3.52 | length 38.1
  Component Side w0.229: v1(20.472,57.103) 20.475,57.1 U1.2@24.393,57.1 ; U3.52 23.208,27.225 v1(24.13,28.147)
  Solder Side w0.229: v1(20.472,57.103) 20.472,55.96 20.041,55.528 20.041,34.776 24.13,30.687 v1(24.13,28.147)
GND: C1.2 C1_Con.2 C1_fte.2 C2.2 C2_fte.2 C3.2 C3_fte.2 C7.1 C8.1 C9.1 C10.1 C11.1 C12.1 C13.1 C14.1 C15.2 C16.2 C18.2 C19.2 CN1.2 CN2.3 CN3.5 CVBat1.1 D1_Con.K D2_Con.K D3_Con.K D4_Con.K D5_Con.K D6_Con.K NOKIA.7 NOKIA.8 P1_fte.3 P4.1 pad.2@13.716,53.34 pad.3 R1_Con.2 R2_Con.1 R3_Con.1 R4.1 R4_Con.1 R5_Con.1 R6_Con.1 R17_Con.2 Rilim.1 Riset.1 Riterm.1 Rtmr.1 S1_Con.9 S1_Con.10 U1.8 U1.16 U1.21 U1.23 U1.24 U1_fte.1 U1_fte.3 U1_fte.6 U1_fte.9 U2_fte.4 U2_fte.5 U2_fte.8 U2_fte.17 U3.12 U3.18 U3.31 U3.47 U3.63 | length 127.1
  Component Side w0.229: R1_Con.2 R4_Con.1 R6_Con.1 v1(2.352,19.175) ; v1(3.546,45.568) Riset.1 Riterm.1 ; v1(3.546,46.838) Riterm.1 ; Rtmr.1@4.953,48.2 Rtmr.1 Riterm.1 ; v1(7.814,47.879) C3_fte.2 v1(9.081,49.146) ; pad.3 v3(9.381,42.807) ; v3(10.381,42.807) 10.381,42.564 10.631,42.314 U2_fte.8 ; v1(12.909,27.879) R17_Con.2 ; v1(13.31,47.473) Rilim.1 v1(14.371,46.158) ; v1(16.515,22.164) C12.1 ; v1(17.831,23.479) C12.1 ; v1(18.341,49.991) C3.2 C2.2 ; v1(18.341,51.515) C2.2 ; v1(18.341,53.039) C1.2 C2.2 ; v1(19.393,13.427) C18.2 v1@20.708,14.743 ; v1(19.4,16.057) C10.1 v1(20.715,14.741) ; v1(19.404,8.347) C19.2 v1(20.719,9.663) ; U3.63 19.375,21.725 18.937,22.164 C12.1 ; v1(22.316,48.7) U1.8@24.393,48.7 ; v1(22.769,34.771) CVBat1.1 23.139,33.456 23.788,32.807 U3.47 ; 23.393,33.456 v1(23.958,33.456) v1@24.085,33.456 ; v1(23.979,7.288) C15.2 v1(25.295,5.973) ; v1(28.381,7.288) C16.2 v1(29.595,5.973) ; v1(28.392,14.101) C14.1 v1(29.707,12.989) ; C7.1 v1(36.743,34.707) ; C8.1 36.046,36.601 v1(36.982,36.601) ; v1(35.588,44.328) U1.16@35.588,46.405 ; U1.21@36.983,54.3 U1.21 v1(39.061,54.3) ; U1.23@36.983,57.1 U1.23 v1(39.061,57.1) 39.9,57.1 40.195,57.394 R4.1 ; U1.24@36.983,58.5 U1.24 v1(39.061,58.5) ; v1(37.059,18.489) C11.1 v1(38.374,19.805) ; D3_Con.K D4_Con.K D5_Con.K D6_Con.K D2_Con.K D1_Con.K v1(43.18,37.997)
  Component Side w0.254: U1_fte.6@7.345,51.803 U1_fte.6 U1_fte.9@7.345,52.565 ; U1_fte.9@7.345,53.048 U1_fte.3 ; U1_fte.9@7.841,53.086 U1_fte.9@7.892,53.035 ; U3.12 28.788,17.647 29.707,16.728 C13.1 C14.1 ; U3.18 35.308,21.719 36.093,20.933 36.093,20.07 36.358,19.805 C11.1 ; U3.31 34.341,28.219 34.371,28.249 34.408,28.249 34.671,28.511 34.671,30.683 34.204,31.15 34.204,34.188 C7.1@34.676,34.66 ; C9.1 C7.1@34.676,34.66 ; C8.1 35.437,34.716 C7.1 34.723,34.707 C7.1@34.676,34.66
  Component Side w0.635: v1(5.011,29.597) CN3.5 v1(10.253,29.597) ; v1(12.74,35.007) C1_Con.2 v1(12.74,38.907) v1@12.74,39.034
  other v1: 7.087,38.481 8.738,38.481 7.976,39.878 7.976,41.275 1.626,49.276 4.166,49.276 1.626,51.181 4.166,51.181 5.995,51.234 5.233,51.641 5.995,52.098 5.233,52.53 10.567,52.733 9.119,52.784 5.995,52.936 9.856,53.241 9.119,53.698 10.618,53.698 12.294,54.356 14.834,54.356 12.294,58.674
  other v3: 9.881,43.307 9.381,43.807 10.381,43.807 7.195,52.86 7.995,52.86
LCD_CD: NOKIA.3 U3.22 | length 16.8
  Component Side w0.229: U3.22 38.927,23.719 40.205,22.44 40.205,16.981 40.462,16.724 v1(40.462,16.18)
  Solder Side w0.229: v1(40.462,16.18) 40.485,16.18 NOKIA.3
LCD_CLK: NOKIA.5 U3.21 | length 17.7
  Component Side w0.229: U3.21 38.78,23.219 39.748,22.25 39.748,16.516 39.719,16.488 39.719,15.348 42.113,12.954 NOKIA.5
LCD_CS: NOKIA.2 U3.20 | length 15.7
  Component Side w0.229: U3.20 38.633,22.719 39.291,22.061 39.291,18.641 v1(38.659,18.009)
  Solder Side w0.229: v1(38.659,18.009) 41.224,20.574 NOKIA.2
LCD_MOSI: NOKIA.4 U3.23 | length 16.2
  Component Side w0.229: U3.23 39.073,24.219 40.663,22.629 40.663,17.17 NOKIA.4
LCD_RST: NOKIA.1 U3.24 | length 10.1
  Component Side w0.229: U3.24 39.22,24.719 40.824,23.114 NOKIA.1
LED1: R13_Con.2 U3.25 | length 4.8
  Component Side w0.229: U3.25 35.963,25.219 36.504,25.759 R13_Con.2
LED2: R14_Con.2 U3.26 | length 5.4
  Component Side w0.229: U3.26 34.532,25.719 36.605,27.791 R14_Con.2
LED3: R15_Con.2 U3.27 | length 6.9
  Component Side w0.229: U3.27 34.336,26.219 36.342,28.224 36.342,29.616 36.549,29.823 R15_Con.2
LED4: R16_Con.2 U3.28 | length 8.6
  Component Side w0.229: U3.28 34.189,26.719 35.885,28.414 35.885,31.465 36.133,31.714 37.52,31.714 R16_Con.2
NetC7_2: C7.2 U3.30 | length 7.1
  Component Side w0.229: U3.30 34.543,27.719 35.427,28.603 C7.2
NetC18_1: C18.1 U3.3 X2.1 | length 11
  Component Side w0.229: C18.1 22.508,12.522 23.372,11.658 X2.1 24.088,11.337 24.288,11.538 U3.3
NetC19_1: C19.1 U3.4 X2.2 | length 14.9
  Component Side w0.229: X2.2 23.372,9.957 22.519,9.104 C19.1 23.841,8.347 24.788,9.294 U3.4
NetD1_Con_A: D1_Con.A R11_Con.1 | length 3
  Component Side w0.229: 39.411,36.732 R11_Con.1
  Component Side w0.254: 39.411,36.732 40.224,35.919 D1_Con.A
NetD1_fte_A: D1_fte.A R1_fte.2 | length 2
  Component Side w0.229: R1_fte.2 D1_fte.A
NetD2_Con_A: D2_Con.A R12_Con.1 | length 6.1
  Component Side w0.229: 37.811,35.7 R12_Con.1
  Component Side w0.254: 37.811,35.7 39.624,33.887 D2_Con.A
NetD2_fte_A: D2_fte.A R2_fte.2 | length 2
  Component Side w0.229: R2_fte.2 D2_fte.A
NetD3_Con_A: D3_Con.A R13_Con.1 | length 2
  Component Side w0.229: R13_Con.1 D3_Con.A
NetD4_Con_A: D4_Con.A R14_Con.1 | length 2
  Component Side w0.229: R14_Con.1 D4_Con.A
NetD5_Con_A: D5_Con.A R15_Con.1 | length 2
  Component Side w0.229: R15_Con.1 D5_Con.A
NetD6_Con_A: D6_Con.A R16_Con.1 | length 2
  Component Side w0.229: R16_Con.1 D6_Con.A
NetL1_2: L1.2 U1_fte.2
NetP1_fte_1: P1_fte.1 Rs_fte.1 | length 2.8
  Component Side w0.381: P1_fte.1 4.281,44.069 Rs_fte.1
NetR1_Con_1: R1_Con.1 S1_Con.16 | length 2.9
  Component Side w0.229: R1_Con.1 4.277,4.373 S1_Con.16
NetR1_fte_1: R1_fte.1 U2_fte.9 | length 8.4
  Component Side w0.229: U2_fte.9 11.356,41.857 11.786,41.427 R1_fte.1
NetR2_Con_2: R2_Con.2 S1_Con.15 | length 2.9
  Component Side w0.229: R2_Con.2 7.087,6.938 S1_Con.15
NetR2_fte_1: R2_fte.1 U2_fte.7 | length 10.1
  Component Side w0.229: U2_fte.7 10.131,40.894 11.248,39.776 R2_fte.1
NetR3_Con_2: R3_Con.2 S1_Con.14 | length 2.9
  Component Side w0.229: R3_Con.2 4.277,9.453 S1_Con.14
NetR4_Con_2: R4_Con.2 S1_Con.13 | length 2.9
  Component Side w0.229: R4_Con.2 7.087,12.018 S1_Con.13
NetR5_Con_2: R5_Con.2 S1_Con.12 | length 2.9
  Component Side w0.229: R5_Con.2 4.277,14.533 S1_Con.12
NetR6_Con_2: R6_Con.2 S1_Con.11 | length 2.9
  Component Side w0.229: R6_Con.2 7.087,17.098 S1_Con.11
NetRilim_2: Rilim.2 U2_fte.12 | length 2.6
  Component Side w0.229: U2_fte.12 12.942,44.057 13.31,44.425 Rilim.2
NetRiset_2: Riset.2 U2_fte.16 | length 3.3
  Component Side w0.229: Riset.2 8.915,45.568 9.131,45.352 9.131,45.212
NetRiterm_2: Riterm.2 U2_fte.15 | length 5.1
  Component Side w0.229: Riterm.2 Riterm.2@6.223,46.838 ; Riterm.2@6.071,46.99 Riterm.2@6.223,46.838 ; U2_fte.15 9.631,45.499 9.029,46.101 7.493,46.101 6.756,46.838 Riterm.2@6.223,46.838
NetRs_fte_2: Rs_fte.2 U2_fte.1 | length 2.4
  Component Side w0.254: Rs_fte.2 U2_fte.1
NetRtmr_2: Rtmr.2 U2_fte.14 | length 6
  Component Side w0.229: Rtmr.2 6.502,48.108 8.052,46.558 9.218,46.558 10.131,45.646 U2_fte.14
NRST: CN1.4 U3.7 | length 14
  Component Side w0.229: U3.7 26.288,15.921 26.61,15.599 v1(27.457,15.599)
  Solder Side w0.229: v1(27.457,15.599) 29.823,15.599 30.353,16.129 35.068,16.129 35.576,15.621 CN1.4
PF0: C15.1 U3.5 X1.2 | length 12.5
  Component Side w0.229: U3.5 25.267,19.049 25.267,14.691 27.095,12.863 X1.2 C15.1
PF1: C16.1 U3.6 X1.1 | length 15.6
  Component Side w0.229: U3.6 25.788,14.897 28.464,12.221 31.039,12.221 31.395,11.865 X1.1 C16.1
READ_ADDR: R18_Con.1 U3.55 | length 9.8
  Component Side w0.229: R18_Con.1 14.92,26.985 15.875,27.94 18.669,27.94 18.872,27.737 18.872,26.624 19.77,25.725 U3.55
T/A: R8_Con.2 S1_Con.8 U3.50 | length 26.4
  Component Side w0.229: R8_Con.2 4.191,23.28 v4(4.191,24.892) ; v4(17.399,28.956) 18.669,28.956 19.4,28.225 U3.50
  Solder Side w0.229: v4(4.191,24.892) 8.255,24.892 10.994,22.153 S1_Con.8 14.732,28.194 15.494,28.956 v4(17.399,28.956)
TCK: CN1.1 U3.49 | length 35
  Component Side w0.229: v1(19.05,30.226) 19.05,29.304 19.628,28.725 U3.49 ; v1(34.036,17.145) 34.036,8.525 34.56,8.001 CN1.1
  Solder Side w0.229: v1(19.05,30.226) 19.685,30.226 25.273,24.638 26.543,24.638 v1(34.036,17.145)
TMS: CN1.3 U3.46 | length 25.6
  Component Side w0.229: U3.46 24.288,29.513 25.527,28.274 v1(25.527,25.988)
  Solder Side w0.229: v1(25.527,25.988) 27.733,25.988 36.449,17.272 37.49,17.272 38.075,16.688 38.075,13.564 37.592,13.081
UART2_RX: CN2.1 U3.17 | length 21.1
  Component Side w0.229: U3.17 34.712,21.219 35.382,20.549 35.382,19.101 36.957,17.526 37.668,17.526 38.786,16.408 38.786,15.099 39.751,14.133 CN2.1
UART2_TX: CN2.2 U3.16 | length 23.8
  Component Side w0.229: U3.16 31.941,19.071 33.525,20.654 34.489,20.654 34.925,20.218 34.925,18.911 36.768,17.069 37.479,17.069 38.329,16.219 38.329,14.909 39.294,13.944 39.294,6.528 CN2.2
USB_DM: CN3.2 U3.44 | length 23.1
  Component Side w0.229: CN3.2 15.972,31.986 19.968,35.982 23.974,35.982 25.288,34.667 U3.44
USB_DP: CN3.3 U3.45 | length 22.5
  Component Side w0.229: CN3.3 15.823,31.19 20.158,35.525 23.784,35.525 24.788,34.521 U3.45
USB_ID: CN3.4 R17_Con.1 | length 6.3
  Component Side w0.229: CN3.4 12.787,30.393 13.401,29.779 R17_Con.1
USB_VBUS: C1_Con.1 C3_fte.1 CN3.1 P4.2 pad.2@11.872,48.661 U2_fte.13 | length 39.2
  Component Side w0.635: CN3.1 15.256,32.782 17.78,35.306 v5(17.78,38.481)
  Solder Side w0.635: pad.2@11.872,48.661 14.966,48.661 16.764,46.863 ; P4.2 16.764,46.863 ; v5(17.78,38.481) 17.78,45.847 16.764,46.863
pads on no net: CN3.SHI U1.4 U3.0 U3.2 U3.8 U3.9 U3.11 U3.14 U3.15 U3.54 U3.56 U3.57 U3.58 U3.59 U3.61 U3.62 X2.3 X2.4
copper on no net:
  other v2: 20.125,1.507 21.375,1.507 22.625,1.507 23.875,1.507 -0.5,28.125 44.5,28.125 -0.5,29.375 44.5,29.375 -0.5,30.625 44.5,30.625 -0.5,31.875 44.5,31.875 20.125,60.5 21.375,60.5 22.625,60.5 23.875,60.5

## Polygon pours and split planes (outlines as drawn)
GND on Component Side "GND" (solid, shelved, pour order 36): 0,40.005 7.595,40.005 7.595,42.799 9.627,42.799 9.627,38.1 0,38.1
+VIN on Component Side "Component Side-No Net" (solid, shelved, pour order 30): 10.973,42.545 10.973,43.815 13.691,43.815 14.58,44.704 14.58,49.149 17.145,49.149 17.145,45.364 14.326,42.545
+VBAT on Component Side "Component Side-No Net" (solid, shelved, pour order 28): 8.814,43.688 8.814,42.926 7.341,42.926 7.341,40.386 0,40.386 0,43.688
USB_VBUS on Component Side "Component Side-No Net" (solid, shelved, pour order 26): 10.389,49.403 12.675,49.403 12.675,44.323 10.389,44.323
+3.3V on Component Side "Top Layer-No Net" (solid, shelved, pour order 4): 0,59.436 0,53.594 6.985,53.594 6.985,54.483 7.417,54.483 7.417,59.436
NetL1_2 on Component Side "Top Layer-No Net" (solid, shelved, pour order 6): 11.024,59.436 7.696,59.436 7.696,53.594 8.001,53.594 8.001,54.356 11.024,54.356
GND on Component Side "Top Layer-No Net" (solid, shelved, pour order 2): 17.145,52.324 17.145,59.436 11.405,59.436 11.405,54.102 8.23,54.102 8.23,53.34 0,53.34 0,48.895 6.452,48.895 6.452,52.324
+VIN on Component Side "Top Layer-No Net" (solid, shelved, pour order 0): 7.722,52.075 17.145,52.075 17.145,49.149 14.58,49.149 14.58,50.19 14.224,50.546 7.722,50.546
no net on Component Side "gnd" (solid, shelved, pour order 44): -3,2 47,2 47,62 -3,62
GND on Solder Side "GND" (solid, shelved, pour order 38): -3,2 47,2 47,62 -3,62
GND on Signal Layer 2 "gnd" (solid, shelved, pour order 40): -3,2 47,2 47,62 -3,62
+3.3V on Signal Layer 1 "3.3" (solid, shelved, pour order 42): -3,2 47,2 47,62 -3,62

## Keep-outs
Keep-Out Layer:
  lines w0.254: 0,2.007 0,60 44,60 44,2.007 0,2.007
  lines w2.4: -1.2,26.9 -1.2,0.807 18.8,0.807 ; -1.2,33.2 -1.2,61.2 18.9,61.2 ; 25.1,0.807 45.2,0.807 45.2,26.8 ; 25.2,61.2 45.2,61.2 45.2,33.1